# Altium PCB ST-Link_hw.PcbDoc
Units mil, origin at the board's own origin, x right, y up, seen from the top; angles counter-clockwise.
Board outline 1692.91 x 787.4 mil, 2 copper layers (Top Layer, Bottom Layer), stack 62.192 mil thick; 49 components, 34 nets, 168 pads, 28 vias.
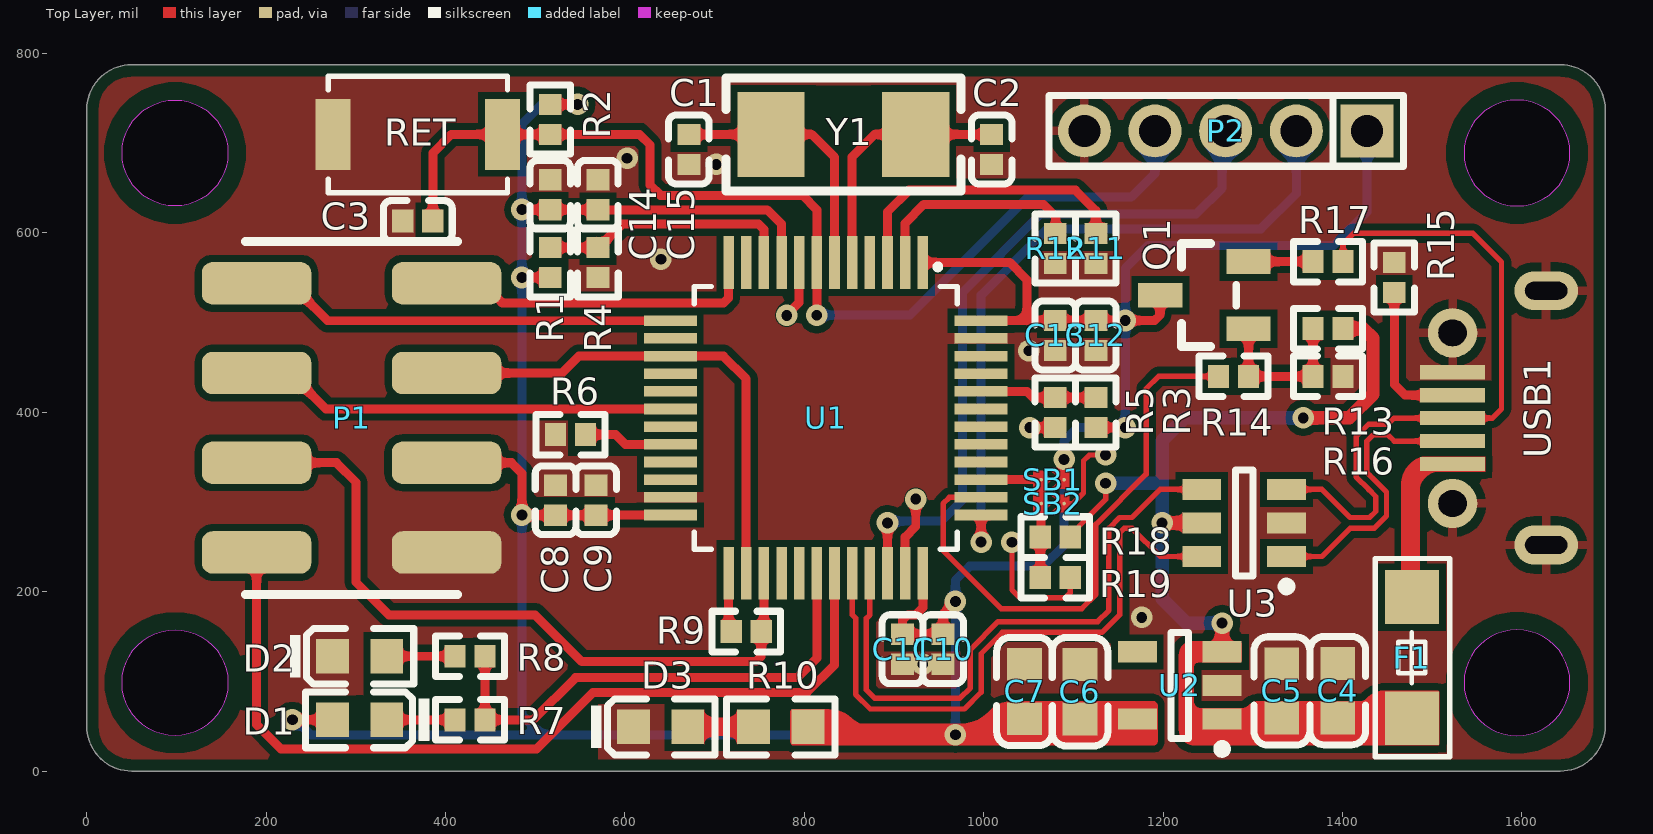
[diagram p0: Top Layer view]
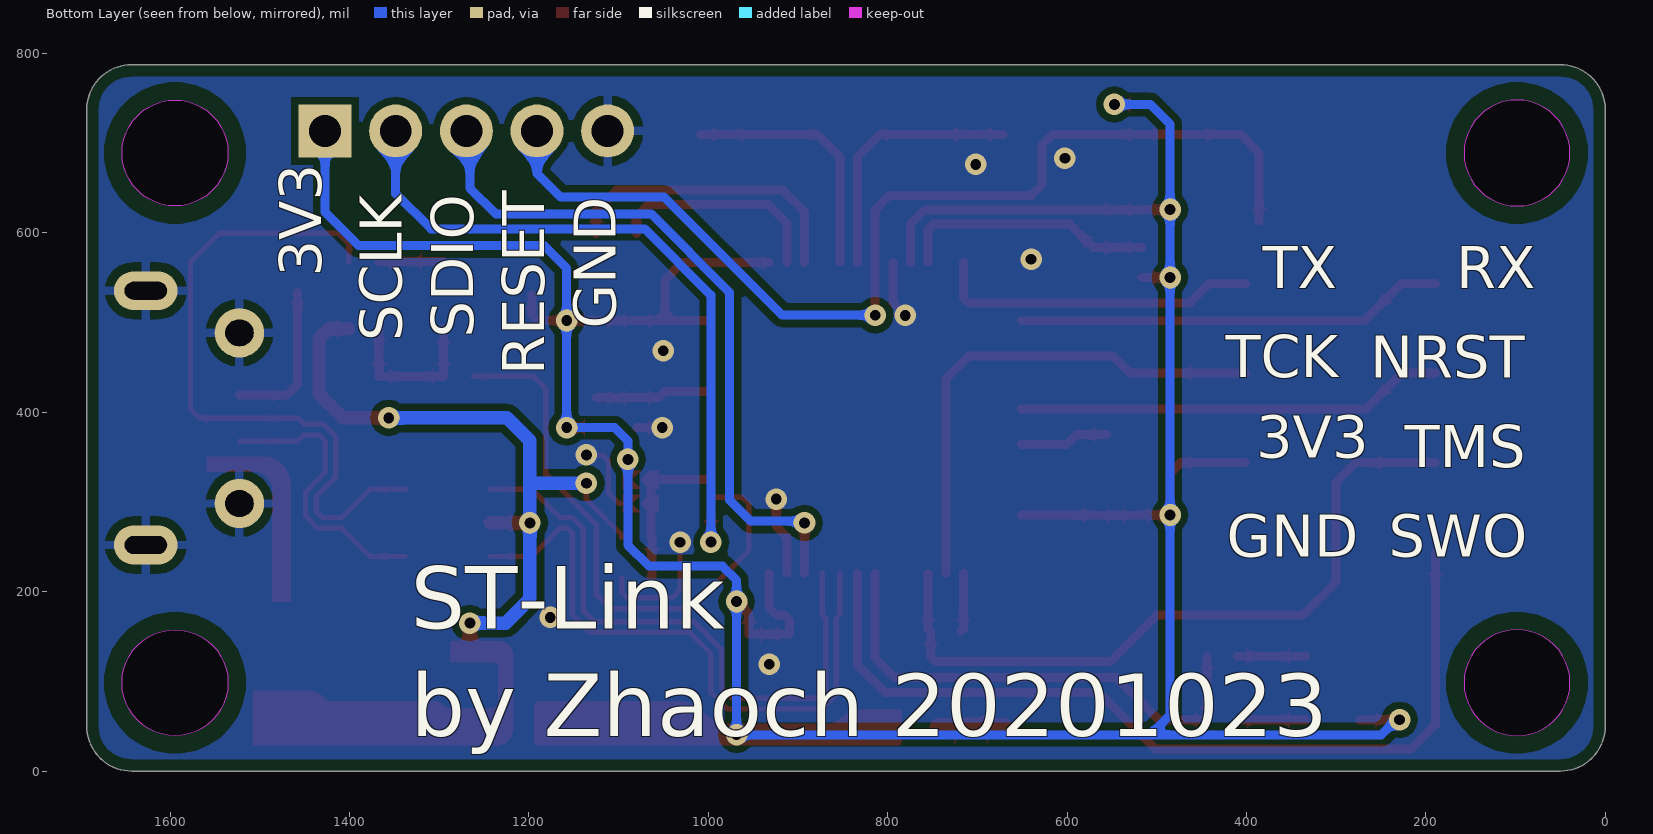
[diagram p1: Bottom Layer view, seen from below]
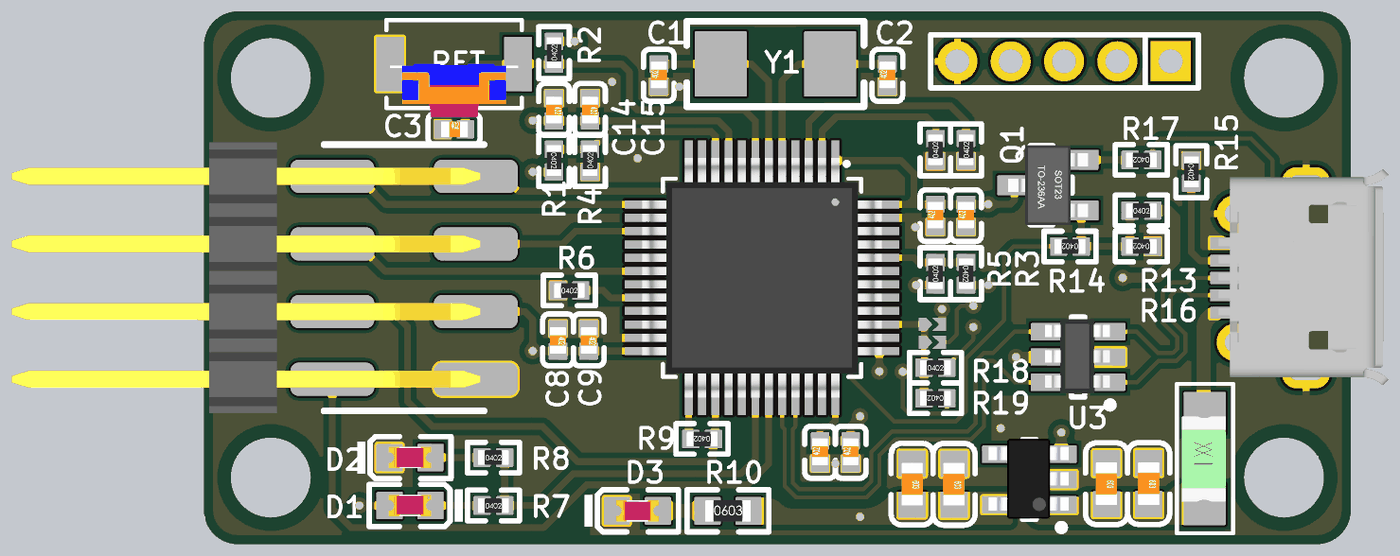
[diagram p2: 3D render of the assembled board from above, using the file's embedded part models]

## Layer stack, top to bottom
Top Solder: solder mask 0.4, Solder Resist, Dk 3.5
Top Layer: signal copper 1.4
Dielectric 1: dielectric 59.3921, FR-4, Dk 4.8
Bottom Layer: signal copper 1.4
Bottom Solder: solder mask 0.4, Solder Resist, Dk 3.5

## Board outline
0,50 0,737.4 cw(c50,737.4) 50,787.4 1642.91,787.4 cw(c1642.91,737.4) 1692.91,737.4 1692.91,50 cw(c1642.91,50) 1642.91,0 50,0 cw(c50,50)
cut-out: 98.43,629.92 cw(c98.43,688.98) 39.37,688.98 cw(c98.43,688.98) 98.43,748.03 cw(c98.43,688.98) 157.48,688.98 cw(c98.43,688.98)
cut-out: 1535.43,98.43 ccw(c1594.49,98.43) 1594.49,39.37 ccw(c1594.49,98.43) 1653.54,98.43 ccw(c1594.49,98.43) 1594.49,157.48 ccw(c1594.49,98.43)
cut-out: 98.43,39.37 cw(c98.43,98.43) 39.37,98.43 cw(c98.43,98.43) 98.43,157.48 cw(c98.43,98.43) 157.48,98.43 cw(c98.43,98.43)
cut-out: 1535.43,688.98 ccw(c1594.49,688.98) 1594.49,629.92 ccw(c1594.49,688.98) 1653.54,688.98 ccw(c1594.49,688.98) 1594.49,748.03 ccw(c1594.49,688.98)

## Design rules (kind name [scope] priority, off if disabled: settings)
AcuteAngle [All] p1: minimum=3.00000000000000E+0001 checktracksonly=FALSE
Clearance [All] p1: gap=6 ignorepadtopadclearanceinfootprint=TRUE
ComponentClearance [All] p1: gap=0 collisioncheckmode=3 verticalgap=10 showdistances=FALSE
DiffPairsRouting [All] p1: maxlimit=10 minlimit=6 mostfreqgap=6 toplayer_minwidth=6 toplayer_maxwidth=15 toplayer_prefwidth=10 bottomlayer_minwidth=6 bottomlayer_maxwidth=15 bottomlayer_prefwidth=10 maxuncoupledlength=500
HoleSize [All] p1: absolutevalues=TRUE maxlimit=240 minlimit=10 maxpercent=80.000 minpercent=20.000
HoleToHoleClearance [All] p1: gap=1 allowstackedmicrovias=TRUE
MinimumAnnularRing [All] p1: minimumring=4
MinimumSolderMaskSliver [All] p1: minsoldermaskwidth=1
PasteMaskExpansion [All] p1: expansion=1
PolygonConnect [All] p1: thpad.connectstyle=Relief thpad.reliefconductorwidth=10 thpad.reliefentries=4 thpad.polygonreliefangle="90 Angle" thpad.airgapwidth=10 smdpad.connectstyle=Direct smdpad.reliefconductorwidth=10 smdpad.reliefentries=4 smdpad.polygonreliefangle="90 Angle" smdpad.airgapwidth=10 via.connectstyle=Direct via.reliefconductorwidth=10 via.reliefentries=4 via.polygonreliefangle="90 Angle" via.airgapwidth=10
RoutingVias [All] p1: holewidth=16 width=32 viastyle="Through Hole" minholewidth=12 minwidth=24 maxholewidth=200 maxwidth=220
SilkToSilkClearance [All] p1: silktosilkclearance=1
SilkToSolderMaskClearance [IsPad] p1: minsilkscreentomaskgap=1 clearancetoexposedcopper=TRUE
SolderMaskExpansion [All] p1: expansion=4
UnConnectedPin [All] p1:
UnRoutedNet [All] p1: checkbadconnections=TRUE
Width [All] p1: maxlimit=500 minlimit=6 preferedwidth=10
21 further rules are at their usual default settings.

## Classes and differential pairs
differential pair USB: +USB_P -USB_N
differential pair USB_D: +USB_D_P -USB_D_N

## Components (designator, comment, footprint, x,y, rotation, side; value= is the part's Value field where it differs from the comment)
C1 "10pF/50V" 0402_C 671.26,692.91 r90 top
C2 "10pF/50V" 0402_C 1008.86,692.91 r90 top
C3 "100nF/16V" 0402_C 369.09,613.19 r0 top
C4 "1uF/50V" 0603_C 1394.69,89.57 r270 top
C5 "100nF/50V" 0603_C 1332.4,89.29 r270 top
C6 "1uF/50V" 0603_C 1107.28,88.39 r270 top
C7 "100nF/50V" 0603_C 1045.47,88.66 r270 top
C8 "1.0uF/25V" 0402_C 522.64,301.87 r270 top
C9 "100nF/16V" 0402_C 567.91,301.87 r270 top
C10 "1.0uF/25V" 0402_C 954.72,135.83 r90 top
C11 "100nF/16V" 0402_C 909.45,135.83 r90 top
C12 "1.0uF/25V" 0402_C 1125,485.53 r90 top
C13 "100nF/16V" 0402_C 1079.73,485.53 r90 top
C14 "1.0uF/25V" 0402_C 516.74,642.42 r270 top
C15 "100nF/16V" 0402_C 569.88,642.42 r270 top
D1 "" 0603_LED_S1 304.14,57.08 r180 top
D2 "" 0603_LED_S1 304.13,127.94 r0 top
D3 "红灯 0603" 0603_LED_S1 639.76,49.21 r0 top
F1 "500mA" F1206 1477.36,193.9 r270 top
P1 "Header" "SMT 2*4 2.54" 295.28,393.7 r270 top
P2 "Header 5" DIP5_2.00 1269.68,713.58 r180 top
Q1 "SS8050" SOT-23(SOT-23-3) 1246.06,530.51 r0 top
R1 "4.7KΩ" 0402_R 516.74,566.93 r270 top
R2 "100KΩ" 0402_R 516.73,726.38 r90 top
R3 "NC" 0402_R 1125,399.61 r270 top
R4 "4.7KΩ" 0402_R 569.89,566.93 r90 top
R5 "100KΩ" 0402_R 1079.73,399.6 r90 top
R6 "10KΩ" 0402_R 539.37,375 r0 top
R7 "330Ω" 0402_R 427.17,57.08 r0 top
R8 "330Ω" 0402_R 427.17,127.94 r0 top
R9 "100Ω" 0402_R 735.24,155.51 r180 top
R10 "3.3K" 0603_R 773.62,49.21 r0 top
R11 "10KΩ" 0402_R 1125,582.68 r90 top
R12 "10KΩ" 0402_R 1079.73,582.68 r90 top
R13 "10KΩ" 0402_R 1383.86,493.11 r0 top
R14 "100Ω" 0402_R 1278.54,439.96 r180 top
R15 "100KΩ" 0402_R 1457.68,550.2 r270 top
R16 "36KΩ" 0402_R 1383.86,439.96 r180 top
R17 "1.5KΩ" 0402_R 1383.86,567.91 r180 top
R18 "2.4KΩ" 0402_R 1079.72,260.83 r0 top
R19 "4.7KΩ" 0402_R 1079.72,215.55 r180 top
RET "Button" SKRKAHE020 369.09,709.65 r0 top
SB1 "SB" SB 1075.79,324.8 r0 top
SB2 "SB" SB 1075.79,298.23 r0 top
U1 "STM32F103C8T6" LQFP-48 823.82,393.7 r270 top
U2 "ADP150" SOT23-5 1218.5,95.47 r180 top
U3 "USBLC6-2" SOT23-6 1290.35,276.57 r180 top
USB1 "USB_SMD" USB_Micro 1574.8,393.7 r180 top
Y1 "8MHz" SMD-5032_2P 843.5,709.65 r0 top

## Footprints (in the part's own frame and the unit in brackets; to place one, negate y for a bottom-side part, rotate by r counter-clockwise, add the part's x,y. Pads: shape width x height; smd on the part's side, far side on the other; paste and mask are expansions set on the pad)
0402_C [mm]
  rect 0.6x0.65 smd mask+0.051: 1(-0.425,0) 2(0.425,0)
  silkscreen extent -0.97,-0.58 0.97,0.58, body extent -0.48,-0.3 0.52,0.3, height 0.2
0402_R [mm]
  rect 0.6x0.65 smd mask+0.051: 1(-0.425,0) 2(0.425,0)
  silkscreen extent -0.97,-0.58 0.97,0.58, body extent -0.57,-0.27 0.58,0.28, height 0.41
0603_C [mm]
  rect 0.93x0.98 smd: 1(-0.77,0) 2(0.77,0)
  silkscreen extent -1.53,-0.79 1.54,0.79, body extent -0.8,-0.4 0.8,0.4, height 0.3
0603_LED_S1 [mm]
  rect 0.93x0.98 smd: A(0.77,0) K(-0.77,0)
  silkscreen extent -1.97,-0.79 1.54,0.79, body extent -0.8,-0.4 0.8,0.4, height 0.6
0603_R [mm]
  rect 0.93x0.98 smd: 1(-0.77,0) 2(0.77,0)
  silkscreen extent -1.53,-0.79 1.54,0.79, body extent -0.85,-0.4 0.85,0.4, height 0.56
DIP5_2.00 [mm]
  rect 1.5x1.5 hole 0.9: 1(-4,0)
  round 1.5 hole 0.9: 2(-2,0) 3(0,0) 4(2,0) 5(4,0)
  silkscreen extent -5.04,-1 5,1
F1206 [mil] "1206 PTR Fuse"
  rect 60x60 smd: 1(0,0) 2(135,0)
  silkscreen extent -43,-41 178,42, body extent 5,-34 131,32, height 22
LQFP-48 [mm]
  rect 1.5x0.3 smd paste+0: 1(-4.4,2.75) 2(-4.4,2.25) 3(-4.4,1.75) 4(-4.4,1.25) 5(-4.4,0.75) 6(-4.4,0.25) 7(-4.4,-0.25) 8(-4.4,-0.75) 9(-4.4,-1.25) 10(-4.4,-1.75) 11(-4.4,-2.25) 12(-4.4,-2.75) 25(4.4,-2.75) 26(4.4,-2.25) 27(4.4,-1.75) 28(4.4,-1.25) 29(4.4,-0.75) 30(4.4,-0.25) 31(4.4,0.25) 32(4.4,0.75) 33(4.4,1.25) 34(4.4,1.75) 35(4.4,2.25) 36(4.4,2.75)
  rect 0.3x1.5 smd paste+0: 13(-2.75,-4.4) 14(-2.25,-4.4) 15(-1.75,-4.4) 16(-1.25,-4.4) 17(-0.75,-4.4) 18(-0.25,-4.4) 19(0.25,-4.4) 20(0.75,-4.4) 21(1.25,-4.4) 22(1.75,-4.4) 23(2.25,-4.4) 24(2.75,-4.4) 37(2.75,4.4) 38(2.25,4.4) 39(1.75,4.4) 40(1.25,4.4) 41(0.75,4.4) 42(0.25,4.4) 43(-0.25,4.4) 44(-0.75,4.4) 45(-1.25,4.4) 46(-1.75,4.4) 47(-2.25,4.4)
  rect 0.3x1.5 smd paste+0 mask+0.102: 48(-2.75,4.4)
  silkscreen extent -4.35,-3.72 3.72,3.72, body extent -4.5,-4.5 4.5,4.5, height 1.6
SB [mm]
  round 0.1 smd mask+0.102: 1(-0.3,0) 2(0.35,0)
  Top Layer region: -0.025,0.25 0.25,0 -0.025,-0.25 0.5,-0.25 0.5,0.25
  Top Layer region: -0.525,-0.25 -0.25,-0.25 0,0 -0.25,0.25 -0.525,0.25
SKRKAHE020 [mm] "3.9*2.9*2"
  rect 1x2 smd: 1(-2.4,0) 2(2.4,0)
  silkscreen extent -2.54,-1.65 2.54,1.65, body extent -2.4,-1.45 2.4,1.45, height 2
SMD-5032_2P [mm]
  rect 1.9x2.4 smd: 1(-2.05,0) 2(2.05,0)
  silkscreen extent -3.32,-1.6 3.32,1.6
"SMT 2*4 2.54" [mm]
  rrect50% 1.2x3.1 smd: 1(-3.81,-2.69) 2(-3.81,2.69) 3(-1.27,-2.69) 4(-1.27,2.69) 5(1.27,-2.69) 6(1.27,2.69) 7(3.81,-2.69) 8(3.81,2.69)
  silkscreen extent -5,-3 5,4.87, body extent -5.08,-14.7 5.08,2.86, height 6
SOT23-5 [mm] "SOT23, 5-Leads, Body 3.0x3.0mm (max), Pitch 0.95mm, IPC Medium Density"
  rect 1.1x0.6 smd: 1(-1.2,0.95) 2(-1.2,0) 3(-1.2,-0.95) 4(1.2,-0.95) 5(1.2,0.95)
  silkscreen extent -1.33,-1.5 0.25,1.92, body extent -1.47,-1.53 1.53,1.47, height 1.3
SOT23-6 [mm] "SOT23, 6-Leads, Body 2.90x2.80mm, Pitch 0.95mm, IPC Medium Density"
  rect 1.1x0.6 smd: 1(-1.2,0.95) 2(-1.2,0) 3(-1.2,-0.95) 4(1.2,-0.95) 5(1.2,0) 6(1.2,0.95)
  silkscreen extent -1.33,-1.5 0.25,1.92, body extent -1.19,-1.42 1.24,1.37, height 1.09
SOT-23(SOT-23-3) [mm]
  rect 1.25x0.7 smd: 1(1.25,-0.95) 2(1.25,0.95) 3(-1.25,0)
  silkscreen extent -0.65,-1.46 0.9,1.46, body extent -1.5,-1.5 1.5,1.5, height 1.3
USB_Micro [mm]
  rect 1.85x0.4 smd: 1(1.325,1.308) 2(1.325,0.658) 3(1.325,0.008) 4(1.325,-0.642) 5(1.325,-1.292)
  oval 1.8x1.1 hole 0.5 slot 1.2 at 0 deg: 6(-1.325,-3.6) 7(-1.325,3.6)
  round 1.4 hole 0.75 slot 0.8 at 0 deg: 8(1.325,2.425) 9(1.325,-2.407)
  body extent -4.42,-4.08 1.95,4.04, height 2.82

## Part data
C1 C2: library part "0402 10pF (100) 5% 50V", "贴片电容", Package=0402, SuppliersPartNumber=C32949, ComponentLink1Description=供应商, ComponentLink1URL=http://www.szlcsc.com/product/details_33914.html, Supplier=LC
C3 C9 C11 C13 C15: library part "0402 100nF (104) 10% 16V", "贴片电容", Package=0402, SuppliersPartNumber=C1525, ComponentLink1Description=供应商, ComponentLink1URL=http://www.szlcsc.com/product/details_1877.html, Supplier=LC
C4 C6: library part "0603 1uF (105) 10% 50V", "贴片电容", Package=0603, SuppliersPartNumber=C15849, ComponentLink1Description=供应商, ComponentLink1URL=http://www.szlcsc.com/product/details_16531.html, Supplier=LC
C5 C7: library part "0603 100nF (104) 10% 50V", "贴片电容", Package=0603, SuppliersPartNumber=C14663, ComponentLink1Description=供应商, ComponentLink1URL=http://www.szlcsc.com/product/details_15331.html, Supplier=LC
C8 C10 C12 C14: library part "0402 1.0uF (105) 10% 25V", "贴片电容", Package=0402, SuppliersPartNumber=C52923, ComponentLink1Description=供应商, ComponentLink1URL=http://www.szlcsc.com/product/details_53938.html, Supplier=LC
D1: library part "0603 蓝灯", "发光二极管", Package=0603, SuppliersPartNumber=C72041, ComponentLink1Description=供应商, ComponentLink1URL=http://www.szlcsc.com/product/details_73150.html, Supplier=LC
D2: library part "0603 绿灯", "发光二极管", Package=0603, SuppliersPartNumber=C72043, ComponentLink1Description=供应商, ComponentLink1URL=http://www.szlcsc.com/product/details_73152.html, Supplier=LC
D3: library part "0603 红灯", "发光二极管", Package=0603, SuppliersPartNumber=C2286, ComponentLink1Description=供应商, ComponentLink1URL=http://www.szlcsc.com/product/details_2659.html, Supplier=LC
F1: library part Fuse, "Fuse"
P1: library part "Header 4X2", "Header, 4-Pin, Dual row", LatestRevisionDate=17-Jul-2002, LatestRevisionNote="Re-released for DXP Platform.", Publisher="Altium Limited"
P2: "Header, 5-Pin"
Q1: library part "SOT-23 SS8050 Y1", "三极管", Package=SOT-23, SuppliersPartNumber=C2150, ComponentLink1Description=供应商, ComponentLink1URL=http://www.szlcsc.com/product/details_2507.html, Supplier=LC
R1 R4 R19: library part "0402 4.7KΩ (4701) 1%", "贴片电阻", Package=0402, SuppliersPartNumber=C25900, ComponentLink1Description=供应商, ComponentLink1URL=http://www.szlcsc.com/product/details_26643.html, Supplier=LC
R2 R5 R15: library part "0402 100KΩ (1003) 1%", "贴片电阻", Package=0402, SuppliersPartNumber=C25741, ComponentLink1Description=供应商, ComponentLink1URL=http://www.szlcsc.com/product/details_26484.html, Supplier=LC
R3 R6 R11 R12 R13: library part "0402 10KΩ (1002) 1%", "贴片电阻", Package=0402, SuppliersPartNumber=C25744, ComponentLink1Description=供应商, ComponentLink1URL=http://www.szlcsc.com/product/details_26487.html, Supplier=LC
R7 R8: library part "0402 330Ω (3300) 1%", "贴片电阻", Package=0402, SuppliersPartNumber=C25104, ComponentLink1Description=供应商, ComponentLink1URL=http://www.szlcsc.com/product/details_25847.html, Supplier=LC
R9 R14: library part "0402 100Ω (1000) 1%", "贴片电阻", Package=0402, SuppliersPartNumber=C25076, ComponentLink1Description=供应商, ComponentLink1URL=http://www.szlcsc.com/product/details_25819.html, Supplier=LC
R10: library part "0603 3.3KΩ (3301) 1%", "贴片电阻", Package=0603, SuppliersPartNumber=C22978, ComponentLink1Description=供应商, ComponentLink1URL=http://www.szlcsc.com/product/details_23705.html, Supplier=LC
R16: library part "0402 39KΩ (3902) 1%", "贴片电阻", Package=0402, SuppliersPartNumber=C25783, ComponentLink1Description=供应商, ComponentLink1URL=http://www.szlcsc.com/product/details_26526.html, Supplier=LC
R17: library part "0402 1.5KΩ (1501) 1%", "贴片电阻", Package=0402, SuppliersPartNumber=C25867, ComponentLink1Description=供应商, ComponentLink1URL=http://www.szlcsc.com/product/details_26610.html, Supplier=LC
R18: library part "0402 2.4KΩ (2401) 1%", "贴片电阻", Package=0402, SuppliersPartNumber=C25882, ComponentLink1Description=供应商, ComponentLink1URL=http://www.szlcsc.com/product/details_26625.html, Supplier=LC
U1: "Mainstream Performance line, ARM Cortex-M3 MCU with 64 Kbytes Flash, 72 MHz CPU, motor control, USB and CAN"
U2: "Ultralow Noise,150 mA CMOS Linear Regulator"
U3: "Very low capacitance ESD protection"
Y1: library part "SMD-5032_2P 8MHz 20ppm 20pF", "贴片晶振", Package=SMD-5032_2P, SuppliersPartNumber=C115962, ComponentLink1Description=供应商, ComponentLink1URL=http://www.szlcsc.com/product/details_117214.html, Supplier=LC

## Via types
v1: diameter 24, hole 12, Top Layer to Bottom Layer, tented both sides, 28 vias

## Nets (pads, with @x,y where several pads share a name; then routed paths per layer and width w, separated by ;. In a path a pad name is that pad's centre, name@x,y a point inside that pad or via, vN(x,y) a via of type N, cw(c..) or ccw(c..) an arc to the next point about the centre after c; other vN are vias at no path point)
AIN: R1.1 R4.2 U1.10 | length 288.3
  Top Layer w10: R1.1 R4.2 570.87,583.66 596.9,609.69 749.06,609.69 754.92,603.83 U1.10
BOOT0: R3.1 R5.2 U1.44 | length 130.8
  Top Layer w10: U1.44 1048.22,423.23 1055.12,416.33 R5.2 R3.1
GND: C1.1 C2.1 C3.1 C4.1 C5.1 C6.1 C7.1 C8.1 C9.1 C10.1 C11.1 C12.1 C13.1 C14.1 C15.1 D2.K D3.K P1.8 P2.5 R4.1 R5.1 R6.1 R11.1 R12.1 R15.1 R16.1 R19.1 RET.1 SB2.2 U1.8 U1.23 U1.35 U1.47 U2.2 U3.2 USB1.5 USB1.6 USB1.7 USB1.8 USB1.9 | length 411.4
  Top Layer w6: v1(1031.5,254.92) 1031.5,201.77 1040.17,193.1 1090.74,193.1 1096.46,198.82 R19.1 ; SB2.2 1099.41,298.23 1111.22,310.04 1111.22,345.91 1117.68,352.36 v1(1135.83,352.36)
  Top Layer w10: v1(780.51,507.87) 780.51,508.62 794.29,522.4 U1.8 ; U1.35 912.4,260.83 924.21,272.64 v1(924.21,303.15) ; v1(1051.18,382.87) R5.1
  other v1: 932.09,119.09 1176.18,171.26 1050.2,468.5 640.2,570.4 701.77,676.18 602.39,683.16
LED_STLINK: R7.2 R8.2 U1.30 | length 564
  Top Layer w10: R8.2 R7.2 497.81,57.08 544.97,104.24 792.27,104.24 813.98,125.95 U1.30
MCU_RESET: C3.2 P2.4 R2.1 RET.2 U1.7 | length 1180.6
  Top Layer w10: C3.2 385.83,688.98 406.5,709.65 RET.2 R2.1 616.24,709.65 627.95,697.93 627.95,653.54 639.81,641.69 797.98,641.69 813.98,625.69 U1.7 v1(813.98,508.12)
  Bottom Layer w10: v1(813.98,508.12) 917.57,508.12 1049.32,639.87 1164.44,639.87 1190.94,666.38 P2.4
MCU_SWCLK: P2.2 U1.37 | length 773.6
  Top Layer w10: v1(997.05,255.24) U1.37
  Bottom Layer w10: v1(997.05,255.24) 997.05,530.51 1070.87,604.33 1309.06,604.33 1348.43,643.7 P2.2
MCU_SWDIO: P2.3 U1.34 | length 784.7
  Top Layer w10: U1.34 v1(892.72,276.57)
  Bottom Layer w10: v1(892.72,276.57) 894.69,278.54 952.76,278.54 976.38,302.17 976.38,533.74 1063.7,621.06 1236.86,621.06 1265.75,649.95 1265.75,709.65 P2.3
NetD1_K: D1.K R7.1 | length 76
  Top Layer w10: D1.K R7.1
NetD2_A: D2.A R8.1 | length 76
  Top Layer w10: D2.A R8.1
NetD3_A: D3.A R10.1 | length 73.2
  Top Layer w20: D3.A R10.1
NetF1_1: F1.1 USB1.1
NetQ1_1: Q1.1 R13.1 R14.1 R16.2 | length 178.1
  Top Layer w10: Q1.1 R14.1 R16.2 R13.1
NetQ1_2: Q1.2 R17.2 | length 71.9
  Top Layer w10: Q1.2 R17.2
NetR6_2: R6.2 U1.20 | length 99
  Top Layer w10: R6.2 589.53,375 600.35,364.17 U1.20
NetR9_2: R9.2 U1.25 | length 66.2
  Top Layer w10: U1.25 715.55,158.46 R9.2
NetR11_2: R11.2 U1.3 | length 333.7
  Top Layer w10: U1.3 892.72,623.42 916.93,647.64 1102.19,647.64 1125,624.83 R11.2
NetR12_2: R12.2 U1.2 | length 244.7
  Top Layer w10: U1.2 912.4,610.67 933.37,631.64 1066.59,631.64 1080.22,618.01 1080.22,599.9 R12.2
NetR15_2: R15.2 USB1.4 | length 172.3
  Top Layer w10: R15.2 1457.68,431.1 1469.82,418.96 USB1.4
NetR18_1: R18.1 R19.2 SB1.1 SB2.1 U1.39 | length 176.8
  Top Layer w10: U1.39 SB1.1 1063.98,319.69 1063.8,319.52 SB2.1@1063.8,298.23 ; R18.1 1062.99,216.54 R19.2@1063.98,215.55 ; R18.1@1063.98,260.83 1063.8,261 1063.8,292.94 1063.98,293.12 SB2.1
OSC_IN: C2.2 U1.5 Y1.2 | length 283.5
  Top Layer w10: U1.5 853.35,684.55 878.45,709.65 Y1.2 C2.2
OSC_OUT: C1.2 U1.6 Y1.1 | length 290.1
  Top Layer w10: C1.2 Y1.1 808.07,709.65 833.66,684.06 U1.6
P3V3: C6.2 C7.2 C8.2 C9.2 C10.2 C11.2 C12.2 C13.2 C14.2 C15.2 D1.A P1.6 P2.1 Q1.3 R1.2 R2.2 R3.2 R10.2 SB1.2 U1.1 U1.9 U1.24 U1.36 U1.48 U2.5 | length 3936.3
  Top Layer w10: v1(229.33,57.09) D1.A ; P1.6 473.47,343.7 485.24,331.93 v1(485.24,285.43) 485.39,285.28 522.49,285.28 C8.2 C9.2 568.06,285.28 650.44,285.28 U1.24 ; v1(485.24,550.2) R1.2 ; v1(485.24,625.98) 485.39,625.83 516.59,625.83 C14.2 C15.2 758.61,625.69 774.61,609.69 U1.9 ; R2.2 v1(547.24,743.11) ; U1.36 932.09,182.16 924.05,174.12 915.31,174.12 909.45,168.26 C11.2 C10.2 954.72,175.2 v1(968.5,188.98) ; U1.1 1028.74,566.93 1048.22,547.45 1048.22,502.12 ; U1.48 997.2,502.12 1048.22,502.12 ; SB1.2 v1(1089.57,347.44) ; R3.2 v1(1157.82,382.87) ; Q1.3 1196.51,530.17 1196.51,508.12 1190.65,502.27 v1(1157.82,502.27) C12.2 C13.2 1079.58,502.12 1048.22,502.12
  Bottom Layer w10: v1(229.33,57.09) 233.12,57.09 249.85,40.35 507.44,40.35 ; v1(547.24,743.11) 507.44,743.11 485.24,720.91 v1(485.24,625.98) v1(485.24,550.2) v1(485.24,285.43) 485.24,62.56 507.44,40.35 ; P2.1 1427.17,623.03 1389.76,585.63 1183.07,585.63 1157.82,560.38 v1(1157.82,502.27) v1(1157.82,382.87) 1104.33,382.87 1089.57,368.11 v1(1089.57,347.44) 1089.57,251.97 1065.95,228.35 984.25,228.35 968.5,212.6 v1(968.5,188.98) v1(968.5,40.35) 507.44,40.35
STLINK_RX: P1.1 U1.13 | length 478.5
  Top Layer w10: P1.1 226.77,543.7 268.5,501.97 U1.13
STLINK_TX: P1.2 U1.12 | length 365.3
  Top Layer w10: P1.2 441.54,543.7 463.58,521.65 709.69,521.65 715.55,527.51 U1.12
T_JTCK: P1.4 U1.15 U1.26 | length 569
  Top Layer w10: P1.4 529.72,443.7 548.62,462.6 U1.15 709.69,462.6 735.24,437.06 U1.26
T_JTMS: P1.5 R9.1 U1.27 | length 816
  Top Layer w10: P1.5 278.35,343.7 300.2,321.85 300.2,210.63 336.71,174.12 499.71,174.12 551.93,121.89 746.11,121.89 751.97,127.75 R9.1 754.92,158.46 U1.27
T_NRST: P1.3 U1.18 | length 477.9
  Top Layer w10: P1.3 226.77,443.7 266.93,403.54 U1.18
T_SWO: P1.7 U1.31 | length 988.4
  Top Layer w10: P1.7 189.37,51.77 216.54,24.61 501.56,24.61 564.63,87.67 802.94,87.67 833.66,118.39 U1.31
USB_D_N: U3.1 USB1.2 | length 323.7
  Top Layer w6: U3.1 1376.97,239.17 1408.37,270.57 1435.18,270.57 1449.01,284.4 1449.01,310.93 1434.34,325.6 1430.21,329.72 1427.17,332.77 1427.17,367.78 1433.96,374.57 1450.88,374.57 1457.68,367.78 USB1.2
USB_D_P: R17.1 U3.3 USB1.3 | length 761
  Top Layer w6: U3.3 1377.06,313.98 1408.46,282.57 1430.21,282.57 1437.01,289.37 1437.01,305.96 1429.37,313.6 1415.17,327.8 1415.17,372.75 1428.99,386.57 1450.79,386.57 1457.58,393.37 USB1.3 1567.09,393.37 1577.26,403.54 1577.26,567.53 1545.39,599.41 1412.4,599.41 1400.59,587.6 R17.1
USB_N: U1.32 U3.6 | length 704.4
  Top Layer w6: U1.32 853.35,174.28 857.19,170.44 857.19,85.49 873.48,69.2 978.42,69.2 997.05,87.83 997.05,130.75 1020.83,154.53 1131.89,154.53 1151.45,174.08 1151.45,265.6 1156.42,270.57 1165.45,270.57 1196.85,239.17 U3.6
USB_P: U1.33 U3.4 | length 684.5
  Top Layer w6: U1.33 873.03,174.12 869.19,170.28 869.19,90.46 878.45,81.2 973.45,81.2 985.05,92.8 985.05,135.72 1015.86,166.53 1126.92,166.53 1139.45,179.06 1139.45,270.57 1151.45,282.57 1165.35,282.57 1196.76,313.98 U3.4
USB_RENUMn: R14.2 U1.38 | length 640.1
  Top Layer w6: U1.38 961.61,305.12 954.72,298.23 954.72,245.87 1019.5,181.1 1109.25,181.1 1125,196.85 1125,274.92 1181.1,331.03 1181.1,426.18 1194.89,439.96 R14.2
VBUS: C4.2 C5.2 F1.2 R13.2 R18.2 U2.1 U2.3 U3.5 | length 859.8
  Top Layer w6: R18.2 1096.46,263.35 1135.83,302.72 v1(1135.83,320.87)
  Top Layer w15: v1(1198.82,276.57) U3.5 ; 1234.18,61.79 1262.03,61.79 U2.1 ; U2.3 v1(1265.75,164.99) ; v1(1356.3,393.7) 1407.58,393.7 1433.96,420.08 1433.96,482.28 1423.13,493.11 R13.2
  Bottom Layer w15: v1(1135.83,320.87) 1198.82,320.87 ; v1(1265.75,164.99) 1225.76,164.99 1198.82,191.93 v1(1198.82,276.57) 1198.82,320.87 ; v1(1356.3,393.7) 1224.41,393.7 1198.82,368.11 1198.82,320.87
pads on no net: U1.4 U1.11 U1.14 U1.16 U1.17 U1.19 U1.21 U1.22 U1.28 U1.29 U1.40 U1.41 U1.42 U1.43 U1.45 U1.46 U2.4

## Polygon pours and split planes (outlines as drawn)
GND on Bottom Layer "GND_L02_P002" (solid, remove dead copper, pour order 2): 0,737.4 cw(c50,737.4) 50,787.4 1642.91,787.4 cw(c1642.91,737.4) 1692.91,737.4 1692.91,50 cw(c1642.91,50) 1642.91,0 50,0 cw(c50,50) 0,50
GND on Top Layer "GND_L01_P004" (solid, remove dead copper, pour order 4): 0,737.4 cw(c50,737.4) 50,787.4 1642.91,787.4 cw(c1642.91,737.4) 1692.91,737.4 1692.91,50 cw(c1642.91,50) 1642.91,0 50,0 cw(c50,50) 0,50

## Other copper
Top Layer:
  pour cut-out: 613.06,350.92 536.29,350.92 536.29,354.2 613.06,354.2
  pour cut-out: 300.13,84.37 308.15,84.37 308.15,37.86 300.13,37.86
  pour cut-out: 308.15,84.37 308.14,84.37 308.14,107.15 430.64,107.15 430.64,77.87 308.07,77.87 308.07,77.76
  pour cut-out: 945.99,580.18 945.99,618.38 1061.48,618.38 1061.48,547.45 1048.22,547.45 1048.22,580.18
  pour cut-out: 570.12,74.41 570.12,15.19 570.12,13.25 516.03,13.25 513.96,15.33 513.96,18.25
  pour cut-out: 769.61,21.92 777.63,21.92 777.63,68.97 772.97,73.62 769.61,73.62
  pour cut-out: 696.39,21.92 717,21.92 716.67,22.25 716.67,29.5 696.63,29.5 696.39,29.26
  pour cut-out: 470.31,430.45 535.21,430.45 554.11,449.34 613.06,449.34 613.06,416.8 470.15,416.8
  pour cut-out: 1213.46,219.36 1162.36,219.36 1162.23,219.49 1162.66,219.92 1162.66,250.97 1164.58,252.88 1167.28,252.88
  pour cut-out: 1162.66,181.1 1162.66,150.85 1162.4,150.59 1162.23,150.76 1144.69,150.76
  pour cut-out: 1515.75,98.43 ccw(c1594.49,98.43) 1594.49,19.68 ccw(c1594.49,98.43) 1673.23,98.43 ccw(c1594.49,98.43) 1594.49,177.17 ccw(c1594.49,98.43)
  pour cut-out: 1515.75,688.98 ccw(c1594.49,688.98) 1594.49,610.24 ccw(c1594.49,688.98) 1673.23,688.98 ccw(c1594.49,688.98) 1594.49,767.72 ccw(c1594.49,688.98)
  pour cut-out: 98.43,610.24 cw(c98.43,688.98) 19.68,688.98 cw(c98.43,688.98) 98.43,767.72 cw(c98.43,688.98) 177.17,688.98 cw(c98.43,688.98)
  pour cut-out: 98.43,19.68 cw(c98.43,98.43) 19.68,98.43 cw(c98.43,98.43) 98.43,177.17 cw(c98.43,98.43) 177.17,98.43 cw(c98.43,98.43)
  region net VBUS: 1242.56,60.43 1242.56,69.88 cw(c1242.56,78.26) 1234.18,78.26 1234.18,115.65 cw(c1239.55,115.65) 1239.55,121.02 1285.39,121.02 ccw(c1285.39,123.03) 1287.4,123.03 1287.4,142.72 ccw(c1285.43,142.72) 1285.43,144.68 1232.44,144.68 ccw(c1232.44,129.76) 1217.52,129.76 1217.52,60.43
  region net VBUS: 1286.88,69.88 ccw(c1286.88,81.75) 1295.28,73.36 cw(c1305.89,62.74) 1305.89,77.76 1418.85,77.76 ccw(c1418.85,89.51) 1427.17,81.2 1428.23,82.26 cw(c1445.87,64.62) 1445.87,89.57 1505.91,89.57 cw(c1505.91,87.6) 1507.87,87.6 1507.87,30.61 cw(c1505.81,30.61) 1505.81,28.54 1234.82,28.54 cw(c1234.82,45.84) 1217.52,45.84 1217.52,66.93 cw(c1220.47,66.93) 1220.47,69.88
  region net P3V3: 827.87,68.9 cw(c827.87,32.87) 853.35,58.35 ccw(c867.33,72.33) 867.33,52.55 973.46,52.55 ccw(c973.46,97.15) 1004.99,65.62 1008.37,68.99 cw(c1029.53,47.83) 1029.53,77.76 1189.01,77.76 cw(c1189.02,72.87) 1193.9,72.87 1193.9,33.46 cw(c1188.98,33.46) 1188.98,28.54 788.39,28.54 cw(c788.39,32.48) 784.45,32.48 784.45,65.94 cw(c787.4,65.94) 787.4,68.9
  region net NetF1_1: 1559.06,333.66 1505.81,333.66 ccw(c1508.26,311.66) 1493.11,327.8 ccw(c1504.26,313.44) 1486.22,315.71 1486.22,188.98 1465.55,188.98 1465.55,321.2 cw(c1493.25,321.2) 1473.66,340.79 1477.36,344.49 cw(c1491.62,330.23) 1491.62,350.39 1559.06,350.39
  pour cut-out: 812.2,764.76 874.81,764.76 874.81,726.26 843.26,698.97 812.2,726.16
  region net VBUS: 1217.52,66.93
Bottom Layer:
  pour cut-out: 1515.75,98.43 ccw(c1594.49,98.43) 1594.49,19.68 ccw(c1594.49,98.43) 1673.23,98.43 ccw(c1594.49,98.43) 1594.49,177.17 ccw(c1594.49,98.43)
  pour cut-out: 1515.75,688.98 ccw(c1594.49,688.98) 1594.49,610.24 ccw(c1594.49,688.98) 1673.23,688.98 ccw(c1594.49,688.98) 1594.49,767.72 ccw(c1594.49,688.98)
  pour cut-out: 98.43,610.24 cw(c98.43,688.98) 19.68,688.98 cw(c98.43,688.98) 98.43,767.72 cw(c98.43,688.98) 177.17,688.98 cw(c98.43,688.98)
  pour cut-out: 98.43,19.68 cw(c98.43,98.43) 19.68,98.43 cw(c98.43,98.43) 98.43,177.17 cw(c98.43,98.43) 177.17,98.43 cw(c98.43,98.43)

## Silkscreen, mask and mechanical layers (free items; w line width, h text height)
Bottom Overlay:
  text "3V3" at 1416.07,551.07 h80 r270
  text "RX" at 166.34,522.64 h80
  text "TX" at 381.68,522.64 h80
  text "GND" at 1087.61,493.17 h80 r270
  text "SDIO" at 1246.57,483.18 h80 r270
  text "SCLK" at 1326.05,479.35 h80 r270
  text "RESET" at 1167.09,440.94 h80 r270
  text "NRST" at 262.19,422.94 h80
  text "TCK" at 423.23,423.2 h80
  text "3V3" at 388.89,333.74 h80
  text "TMS" at 223.61,323.24 h80
  text "SWO" at 241.14,223.43 h80
  text "GND" at 422.24,223.2 h80
  text "ST-Link / by Zhaoch 20201023" at 1331.69,15.9 h120
Mechanical 1:
  circle w0.05: c1594.49,98.43 r59.06
  circle w0.05: c1594.49,688.98 r59.06
  circle w0.05: c98.43,98.43 r59.06
  circle w0.05: c98.43,688.98 r59.06
  lines w0.51: 115.16,787.4 116.14,787.4 ccw(c116.14,788.39) 117.13,788.39
  lines w10: 1642.72,787.4 50,787.4 ccw(c50,737.4) 0,737.4 0,50 ccw(c50,50) 50,0 1642.91,0 ccw(c1642.91,50) 1692.91,50 1692.91,737.4 ccw(c1642.91,737.4) 1642.91,787.4